# Altium PCB PCB1.PcbDoc
Units mil, origin at the board's own origin, x right, y up, seen from the top; angles counter-clockwise.
Board outline 2100 x 2600 mil, 2 copper layers (Top Layer, Bottom Layer); 19 components, 26 nets, 136 pads, 3 vias.
Unrouted connection lines stored in the file: 39.
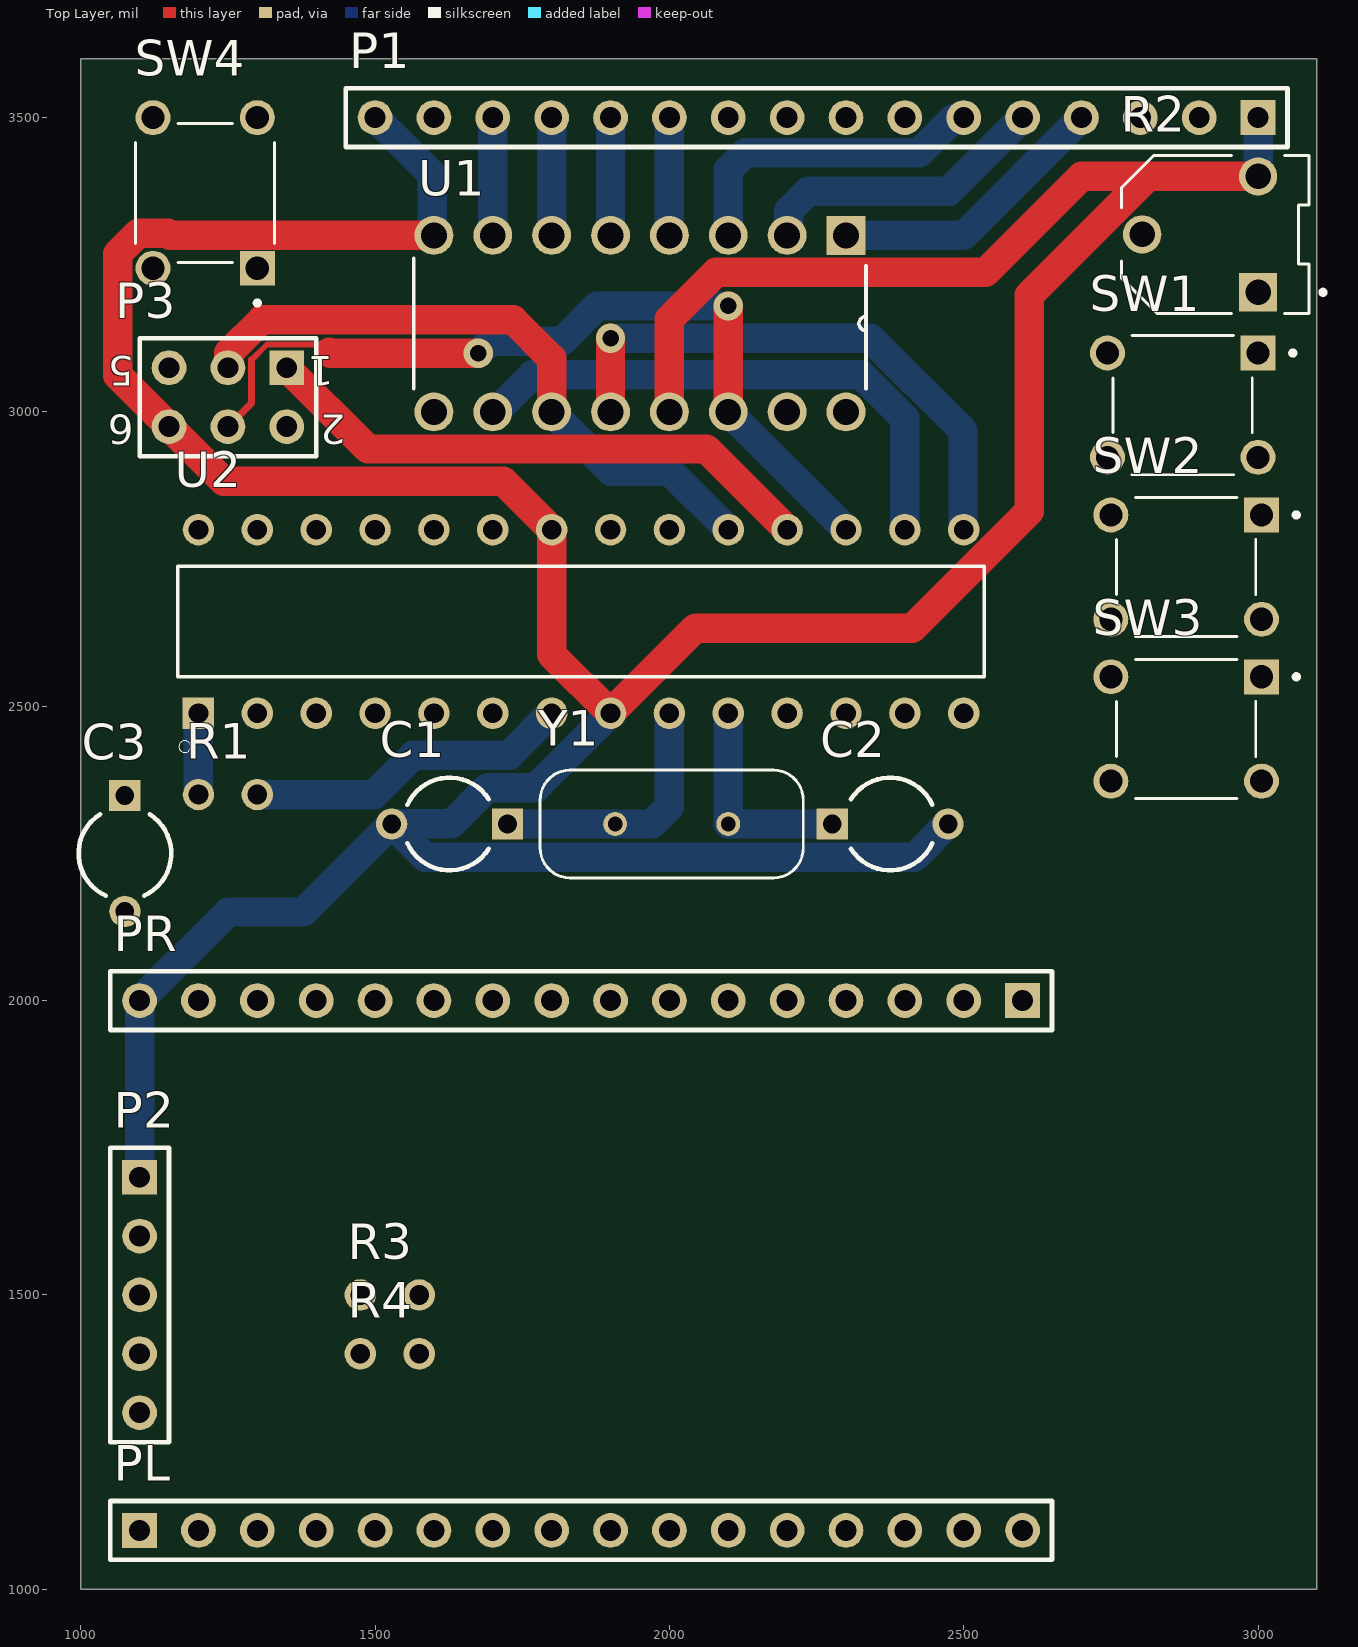
[diagram p0: Top Layer view]
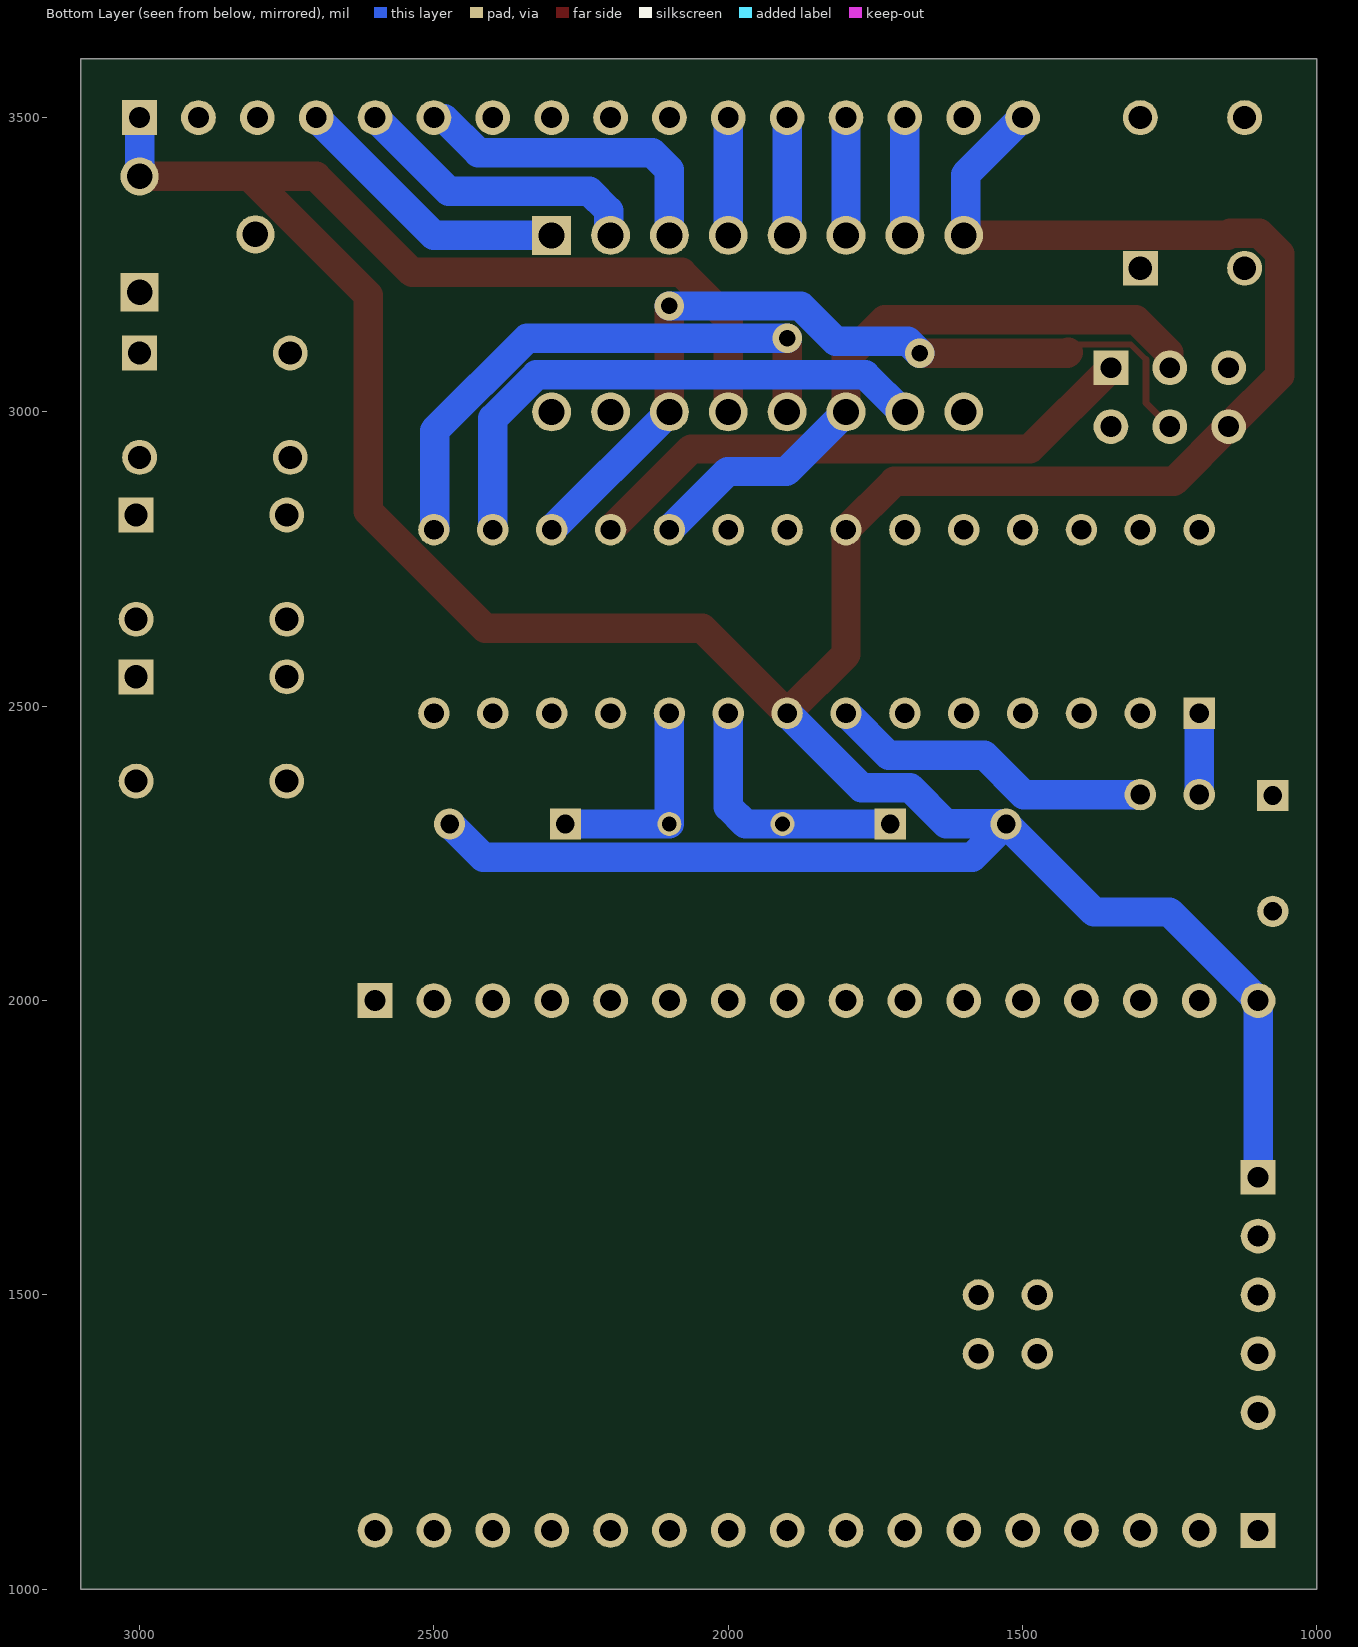
[diagram p1: Bottom Layer view, seen from below]

## Layer stack, top to bottom
Top Solder: solder mask 0.4, Solder Resist, Dk 3.5
Top Layer: signal copper 1.4
Dielectric 1: dielectric 12.6, FR-4, Dk 4.8
Bottom Layer: signal copper 1.4
Bottom Solder: solder mask 0.4, Solder Resist, Dk 3.5

## Board outline
1000,1000 3100,1000 3100,3600 1000,3600

## Design rules (kind name [scope] priority, off if disabled: settings)
Clearance [All] p1: gap=5 ignorepadtopadclearanceinfootprint=TRUE
PolygonConnect [All] p1: connectstyle=Relief reliefconductorwidth=10 reliefentries=4 polygonreliefangle="90 Angle" airgapwidth=10
RoutingVias [All] p1: holewidth=28 width=50 viastyle="Through Hole" minholewidth=28 minwidth=50 maxholewidth=28 maxwidth=50
SolderMaskExpansion [All] p1: expansion=4 istentingtop=FALSE
Width [All] p1: maxlimit=100 minlimit=10 preferedwidth=50
30 further rules are at their usual default settings.

## Components (designator, comment, footprint, x,y, rotation, side; value= is the part's Value field where it differs from the comment)
C1 "Cap2" CAPR5-4X5 1626.57,2300 r180 top value=100pF
C2 "Cap2" CAPR5-4X5 2375,2300 r0 top value=100pF
C3 "Cap2" CAPR5-4X5 1075,2250 r270 top value=100pF
P1 "Header 16" HDR1X16 3000,3500 r180 top
P2 "Header 5" HDR1X5 1100,1700 r270 top
P3 "Header 3X2" HDR2X3 1350,3075 r180 top
PL "Header 16" HDR1X16 1100,1100 r0 top
PR "Header 16" HDR1X16 2600,2000 r180 top
R1 "Resistor" StandingAxial 1250,2350 r180 top
R2 "3306F-1-105" TRIM_3306F-1-105 2901.57,3301.57 r180 top
R3 "Resistor" StandingAxial 1525,1500 r180 top
R4 "Resistor" StandingAxial 1525,1400 r180 top
SW1 "TL1105F160Q" SW_TL1105F160Q 2872.05,3011.42 r180 top
SW2 "TL1105F160Q" SW_TL1105F160Q 2877.95,2736.42 r180 top
SW3 "TL1105F160Q" SW_TL1105F160Q 2877.95,2461.42 r180 top
SW4 "TL1105F160Q" SW_TL1105F160Q 1211.42,3372.05 r90 top
U1 "74HC595N" DIP254P762X420-16 1950,3155 r270 top
U2 "ATMEGA328P-PU" DIP794W46P254L2967H457Q28B 1850,2644.09 r90 top
Y1 "ECS-160-S-4" XTAL_ECS-160-20-4X 2003.94,2300 r180 top

## Footprints (in the part's own frame and the unit in brackets; to place one, negate y for a bottom-side part, rotate by r counter-clockwise, add the part's x,y. Pads: shape width x height; smd on the part's side, far side on the other; paste and mask are expansions set on the pad)
CAPR5-4X5 [mm] "Capacitor; 2 Leads"
  rect 1.35x1.35 hole 0.8: 1(-2.5,0)
  round 1.35 hole 0.8: 2(2.5,0)
  silkscreen extent -1.69,-2 1.82,2
DIP254P762X420-16 [mil]
  rect 66x66 / inner round 66 / far side rect 66x66 hole 44: 1(-145,350)
  round 66 hole 44: 2(-145,250) 3(-145,150) 4(-145,50) 5(-145,-50) 6(-145,-150) 7(-145,-250) 8(-145,-350) 9(155,-350) 10(155,-250) 11(155,-150) 12(155,-50) 13(155,50) 14(155,150) 15(155,250) 16(155,350)
  silkscreen extent -106,-384 116,384, body extent -181,-375 191,375, height 165
DIP794W46P254L2967H457Q28B [mm]
  rect 1.358x1.358 hole 0.85: 1(-3.96,16.51)
  round 1.358 hole 0.85: 2(-3.96,13.97) 3(-3.96,11.43) 4(-3.96,8.89) 5(-3.96,6.35) 6(-3.96,3.81) 7(-3.96,1.27) 8(-3.96,-1.27) 9(-3.96,-3.81) 10(-3.96,-6.35) 11(-3.96,-8.89) 12(-3.96,-11.43) 13(-3.96,-13.97) 14(-3.96,-16.51) 15(3.96,-16.51) 16(3.96,-13.97) 17(3.96,-11.43) 18(3.96,-8.89) 19(3.96,-6.35) 20(3.96,-3.81) 21(3.96,-1.27) 22(3.96,1.27) 23(3.96,3.81) 24(3.96,6.35) 25(3.96,8.89) 26(3.96,11.43) 27(3.96,13.97) 28(3.96,16.51)
  silkscreen extent -5.65,-17.4 2.38,17.4, body extent -3.95,-17.34 3.95,17.34, height 4.57
HDR1X5 [mm] "Connector; Header; 5 Position"
  rect 1.5x1.5 hole 0.9: 1(0,0)
  round 1.5 hole 0.9: 2(2.54,0) 3(5.08,0) 4(7.62,0) 5(10.16,0)
  silkscreen extent -1.27,-1.27 11.43,1.27
HDR1X16 [mm] "Connector; Header; 16 Position"
  rect 1.5x1.5 hole 0.9: 1(0,0)
  round 1.5 hole 0.9: 2(2.54,0) 3(5.08,0) 4(7.62,0) 5(10.16,0) 6(12.7,0) 7(15.24,0) 8(17.78,0) 9(20.32,0) 10(22.86,0) 11(25.4,0) 12(27.94,0) 13(30.48,0) 14(33.02,0) 15(35.56,0) 16(38.1,0)
  silkscreen extent -1.27,-1.27 39.37,1.27
HDR2X3 [mm] "Connector; Header; 3x2 Position"
  rect 1.5x1.5 hole 0.9: 1(0,0)
  round 1.5 hole 0.9: 2(0,2.54) 3(2.54,0) 4(2.54,2.54) 5(5.08,0) 6(5.08,2.54)
  silkscreen extent -1.27,-1.27 6.35,3.81
StandingAxial [mm]
  round 1.358 hole 0.85: 0(1.27,0) 1(-1.27,0)
  body extent 0,-0.44 1.65,0.45, height 2.54
SW_TL1105F160Q [mm]
  rect 1.508x1.508 / inner round 1.508 / far side rect 1.508x1.508 hole 1: 1(-3.25,-2.25)
  round 1.508 hole 1: 2(3.25,-2.25) 3(-3.25,2.25) 4(3.25,2.25)
  silkscreen extent -4.85,-3 3,3, body extent -3.95,-3 3.95,3, height 4.3
TRIM_3306F-1-105 [mm]
  rect 1.65x1.65 hole 1.1: 1(-2.5,2.5)
  round 1.65 hole 1.1: 2(2.5,0) 3(-2.5,-2.5)
  silkscreen extent -5.4,-3.4 3.4,3.4, body extent -4.7,-3.4 3.4,3.4, height 8.38
XTAL_ECS-160-20-4X [mm]
  round 1.03 hole 0.63: 1(-2.44,0) 2(2.44,0)
  silkscreen extent -5.68,-2.33 5.68,2.33, body extent -5.68,-2.32 5.68,2.32, height 3.5

## Part data
C1 C2 C3: "Capacitor", PackageDescription="Capacitor; 2 Leads", PackageReference=CAPR5-4X5, Published=23-Sep-2002, Publisher="Altium Limited"
P1 PL PR: "Header, 16-Pin", LatestRevisionDate=17-Jul-2002, LatestRevisionNote="Re-released for DXP Platform.", Publisher="Altium Limited"
P2: "Header, 5-Pin", LatestRevisionDate=17-Jul-2002, LatestRevisionNote="Re-released for DXP Platform.", Publisher="Altium Limited"
P3: "Header, 3-Pin, Dual row", LatestRevisionDate=17-Jul-2002, LatestRevisionNote="Re-released for DXP Platform.", Publisher="Altium Limited"
R2: "1 MOhms 0.2W, 1/5W PC Pins Through Hole Trimmer Potentiometer Cermet 1 Turn Top Adjustment"
U1: "Shift Shift Register 1 Element 8 Bit 16-DIP"
U2: "ATmega Series 20 MHz 32 KB Flash 2 KB SRAM 8-Bit Microcontroller - DIP-28", Package=None, Availability=Unavailable, MP=ATMEGA328P-PU, Price=None
Y1: "16MHz Â±30ppm Crystal Series 40 Ohms HC-49/US"

## Via types
v1: diameter 50, hole 28, Top Layer to Bottom Layer, 3 vias

## Nets (pads, with @x,y where several pads share a name; then routed paths per layer and width w, separated by ;. In a path a pad name is that pad's centre, name@x,y a point inside that pad or via, vN(x,y) a via of type N, cw(c..) or ccw(c..) an arc to the next point about the centre after c; other vN are vias at no path point)
3.3V: PL.1 R3.1 R4.1
5V: P1.2 P1.15 P2.2 P3.2 PL.15 R1.1 R2.1 U1.16 U2.7 U2.20 | length 557.2
  Bottom Layer w50: R1.1 1498.14,2350 1564.96,2416.82 1727.69,2416.82 1799.06,2488.19 U2.7
D4: P1.11 U1.4 | length 200
  Bottom Layer w50: U1.4 P1.11
D5: P1.12 U1.5 | length 200
  Bottom Layer w50: U1.5 P1.12
D6: P1.13 U1.6 | length 200
  Bottom Layer w50: U1.6 P1.13
D7: P1.14 U1.7 | length 200
  Bottom Layer w50: U1.7 P1.14
EN: P1.6 U1.3 | length 541.2
  Bottom Layer w50: U1.3@2100,3304.33 2100,3411.18 2129.29,3440.47 2424.66,3440.47 2482.45,3498.27 2495.82,3498.27 P1.6@2497.55,3500
GND: C1.2 C2.2 C3.2 P1.1 P1.16 P2.1 P3.6 PR.1 PR.16 R2.3 SW1.1 SW1.2 SW2.1 SW2.2 SW3.1 SW3.2 SW4.1 SW4.2 U1.8 U1.13 U2.8 U2.22 | length 7358.2
  Top Layer w50: U1.8 1151.34,3300 1147.56,3303.78 1098.11,3303.78 1063.15,3268.82 1063.15,3061.85 P3.6 1243,2882 1718,2882 U2.22 1800,2588.19 U2.8 2044.49,2632.68 2412.91,2632.68 2611.63,2831.4 2611.63,3198.42 2813.21,3400 ; U1.13 2000,3157.78 2079.22,3237 2537,3237 2700,3400 2813.21,3400 ; R2.3 2813.21,3400
  Bottom Layer w50: P2.1 PR.16 1250.57,2150.57 1378.71,2150.57 C1.2 ; P1.16 1596.94,3403.06 1596.94,3303.06 U1.8 ; U2.8 1773.63,2361.82 1691.24,2361.82 1629.72,2300.3 1528.45,2300.3 C1.2 ; C2.2 2472.57,2300 2416,2243.43 1585.58,2243.43 1529,2300 C1.2 ; R2.3 P1.1
MISO: P3.1 U2.18 | length 963.9
  Top Layer w50: P3.1 1488,2937 2063,2937 U2.18
MOSI: P3.4 U1.14 U2.17 | length 1452.7
  Top Layer w10: 1290.47,3088.67 1316.33,3114.53 1409.53,3114.53 1422.45,3101.61
  Top Layer w11.89: P3.4 1290.47,3015.47 1290.47,3088.67
  Top Layer w50: 1422.45,3101.61 1424.06,3100 v1(1675,3100) ; U1.14 v1(2100,3180)
  Bottom Layer w50: v1(1675,3100) 1695,3120 1817.22,3120 1877.22,3180 v1(2100,3180) ; U1.14 U2.17
NetC1_1: C1.1 U2.9 Y1.2 | length 446
  Bottom Layer w50: C1.1 Y1.2 1970.71,2300 2000,2329.29 U2.9
NetC2_1: C2.1 U2.10 Y1.1 | length 364.8
  Bottom Layer w50: U2.10 Y1.1 C2.1
RCLK: U1.12 U2.15 | length 956.2
  Top Layer w50: U1.12 v1(1900,3125)
  Bottom Layer w50: v1(1900,3125) 2341.88,3125 2498.72,2968.16 2498.72,2803.73 2499.34,2803.11 2499.34,2801.6 U2.15@2498.87,2801.13
RESET: C3.1 P3.5 R1.0 SW4.3 SW4.4 U2.1 | length 138.2
  Bottom Layer w50: R1.0 U2.1
RS: P1.4 U1.1 | length 482.8
  Bottom Layer w50: U1.1 2500,3300 P1.4
RW: P1.5 U1.2 | length 505.5
  Bottom Layer w50: U1.2 2203.06,3303.06 2203.06,3341.75 2236.31,3375 2475,3375 P1.5
RXESP: PR.12 U2.3
SCK: P3.3 U1.11 U2.19 | length 1103.2
  Top Layer w50: P3.3 1251.73,3076.73 1251.73,3100.76 1307.57,3156.61 1734.44,3156.61 1800,3091.04 U1.11
  Bottom Layer w50: U1.11@1795.67,3000 U1.11 1901.2,2898.8 2001.2,2898.8 U2.19
SCL: P2.4 PR.14 R4.0 U2.28
SDA: P2.3 PR.11 R3.0 U2.27
SS: U1.10 U2.16 | length 945.8
  Bottom Layer w50: U1.10 1704.33,3000 1767.33,3063 2326.09,3063 2400,2989.09 U2.16
SW1: SW1.3 SW1.4 U2.13
SW2: SW2.3 SW2.4 U2.12
SW3: SW3.3 SW3.4 U2.11
TXESP: PR.13 U2.2
V0: P1.3 R2.2
pads on no net: P1.7 P1.8 P1.9 P1.10 P2.5 PL.2 PL.3 PL.4 PL.5 PL.6 PL.7 PL.8 PL.9 PL.10 PL.11 PL.12 PL.13 PL.14 PL.16 PR.2 PR.3 PR.4 PR.5 PR.6 PR.7 PR.8 PR.9 PR.10 PR.15 U1.9 U1.15 U2.4 U2.5 U2.6 U2.14 U2.21 U2.23 U2.24 U2.25 U2.26

## Silkscreen, mask and mechanical layers (free items; w line width, h text height)
Mechanical 1:
  the board outline again, w10

## Text inside footprints (layer, text, board x,y; h text height)
P3: Top Overlay "6" at 1090,2995 h50 r180; Top Overlay "5" at 1090,3095 h50 r180; Top Overlay "2" at 1450,2995 h50 r180; Top Overlay "1" at 1430,3095 h50 r180